# Altium PCB crossBarAdDaPCB1.PcbDoc (part 1 of 2)
Units mm, origin at the board's own origin, x right, y up, seen from the top; angles counter-clockwise.
Board outline 152.4 x 111.9 mm, 6 copper layers (Top Layer, Mid-Layer 1, Internal Plane 1, Internal Plane 2, Mid-Layer 2, Bottom Layer); 114 components, 142 nets, 664 pads, 264 vias.
Unrouted connection lines stored in the file: 16.
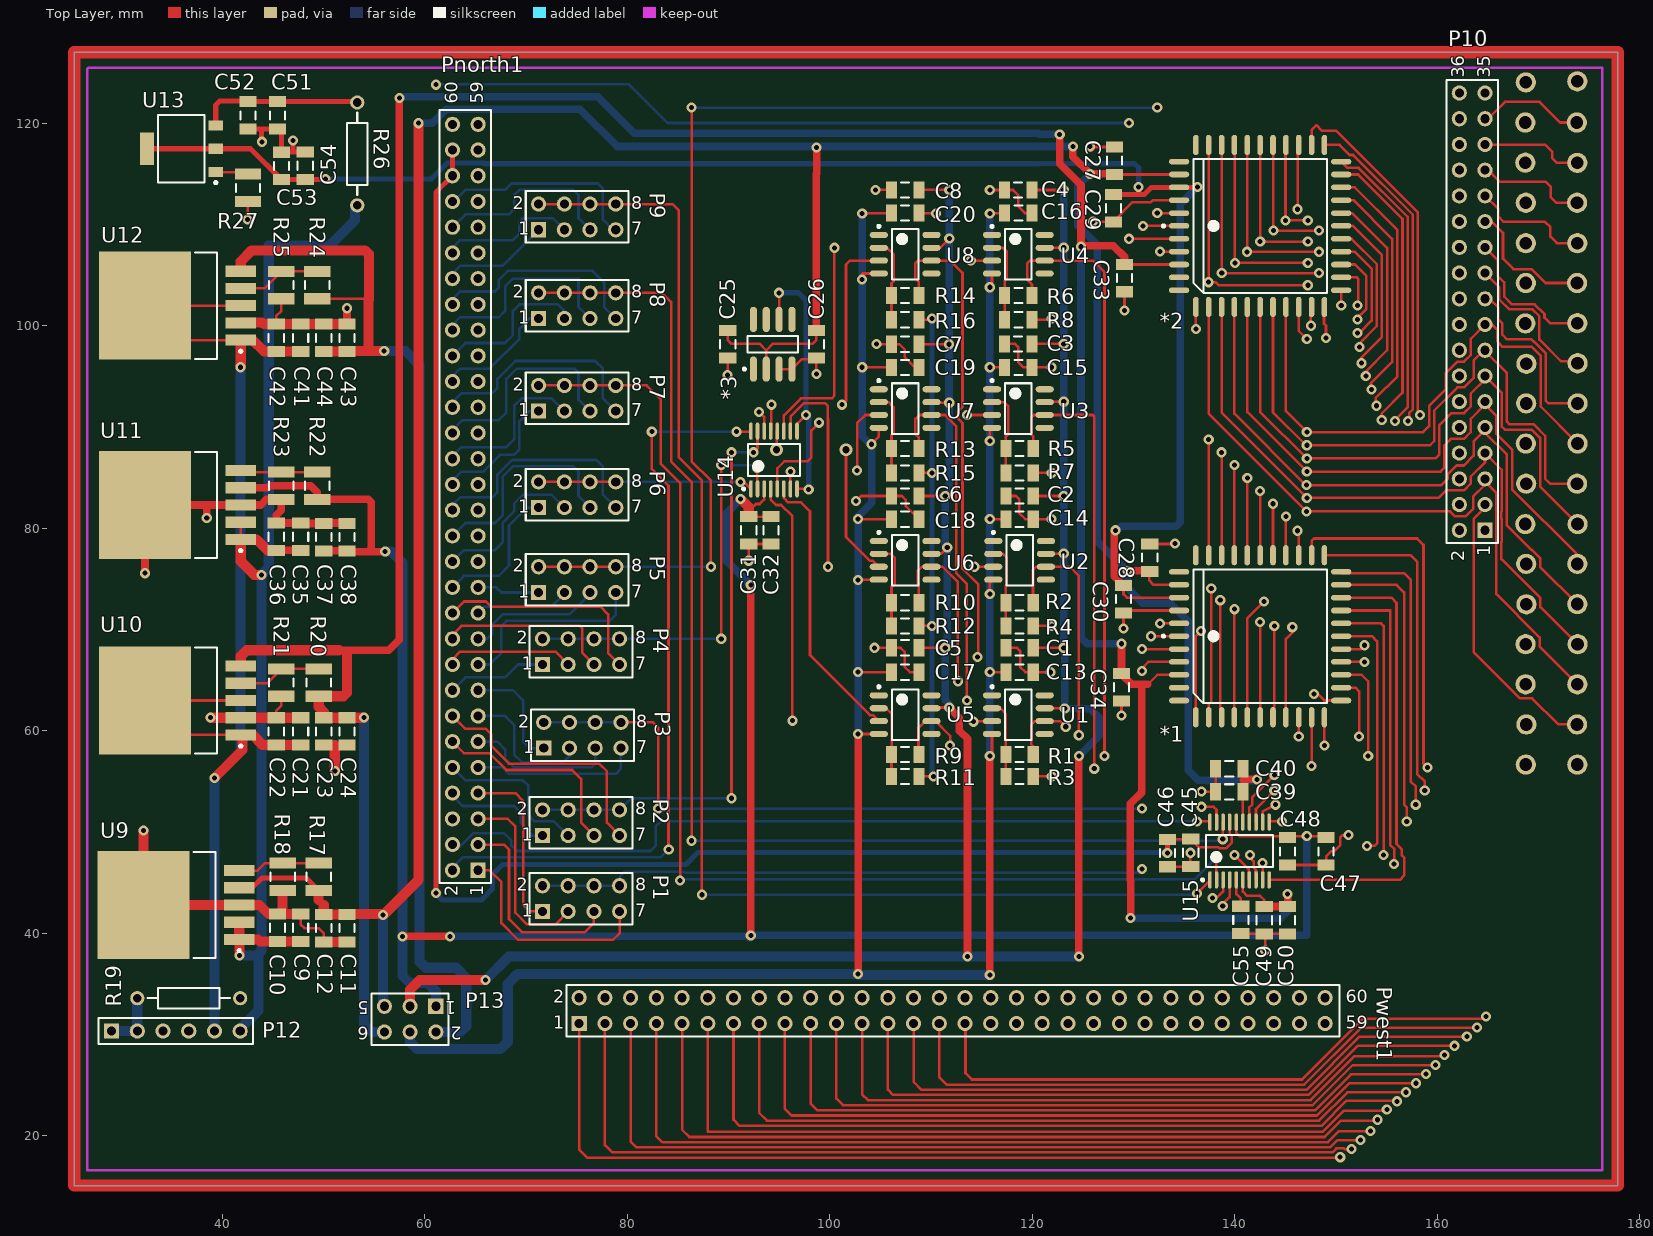
[diagram p0: Top Layer view]
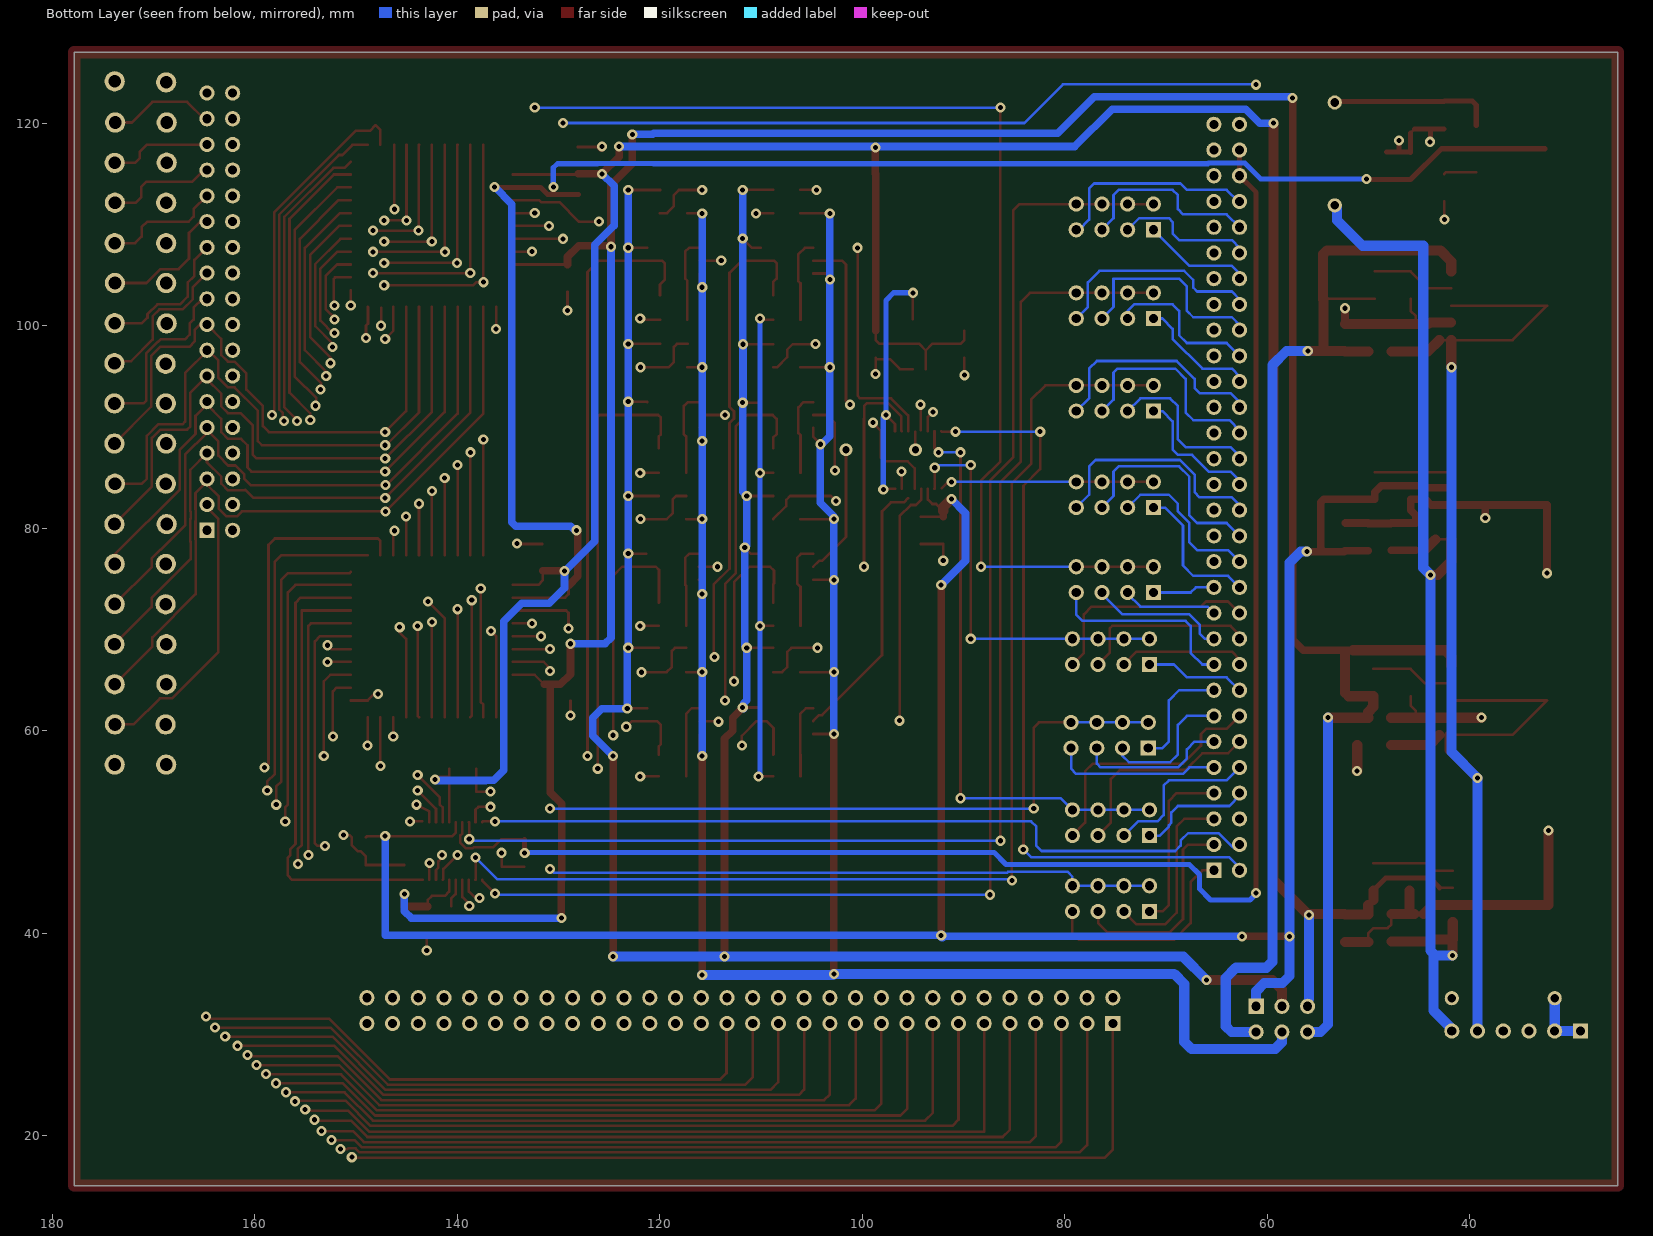
[diagram p1: Bottom Layer view, seen from below]
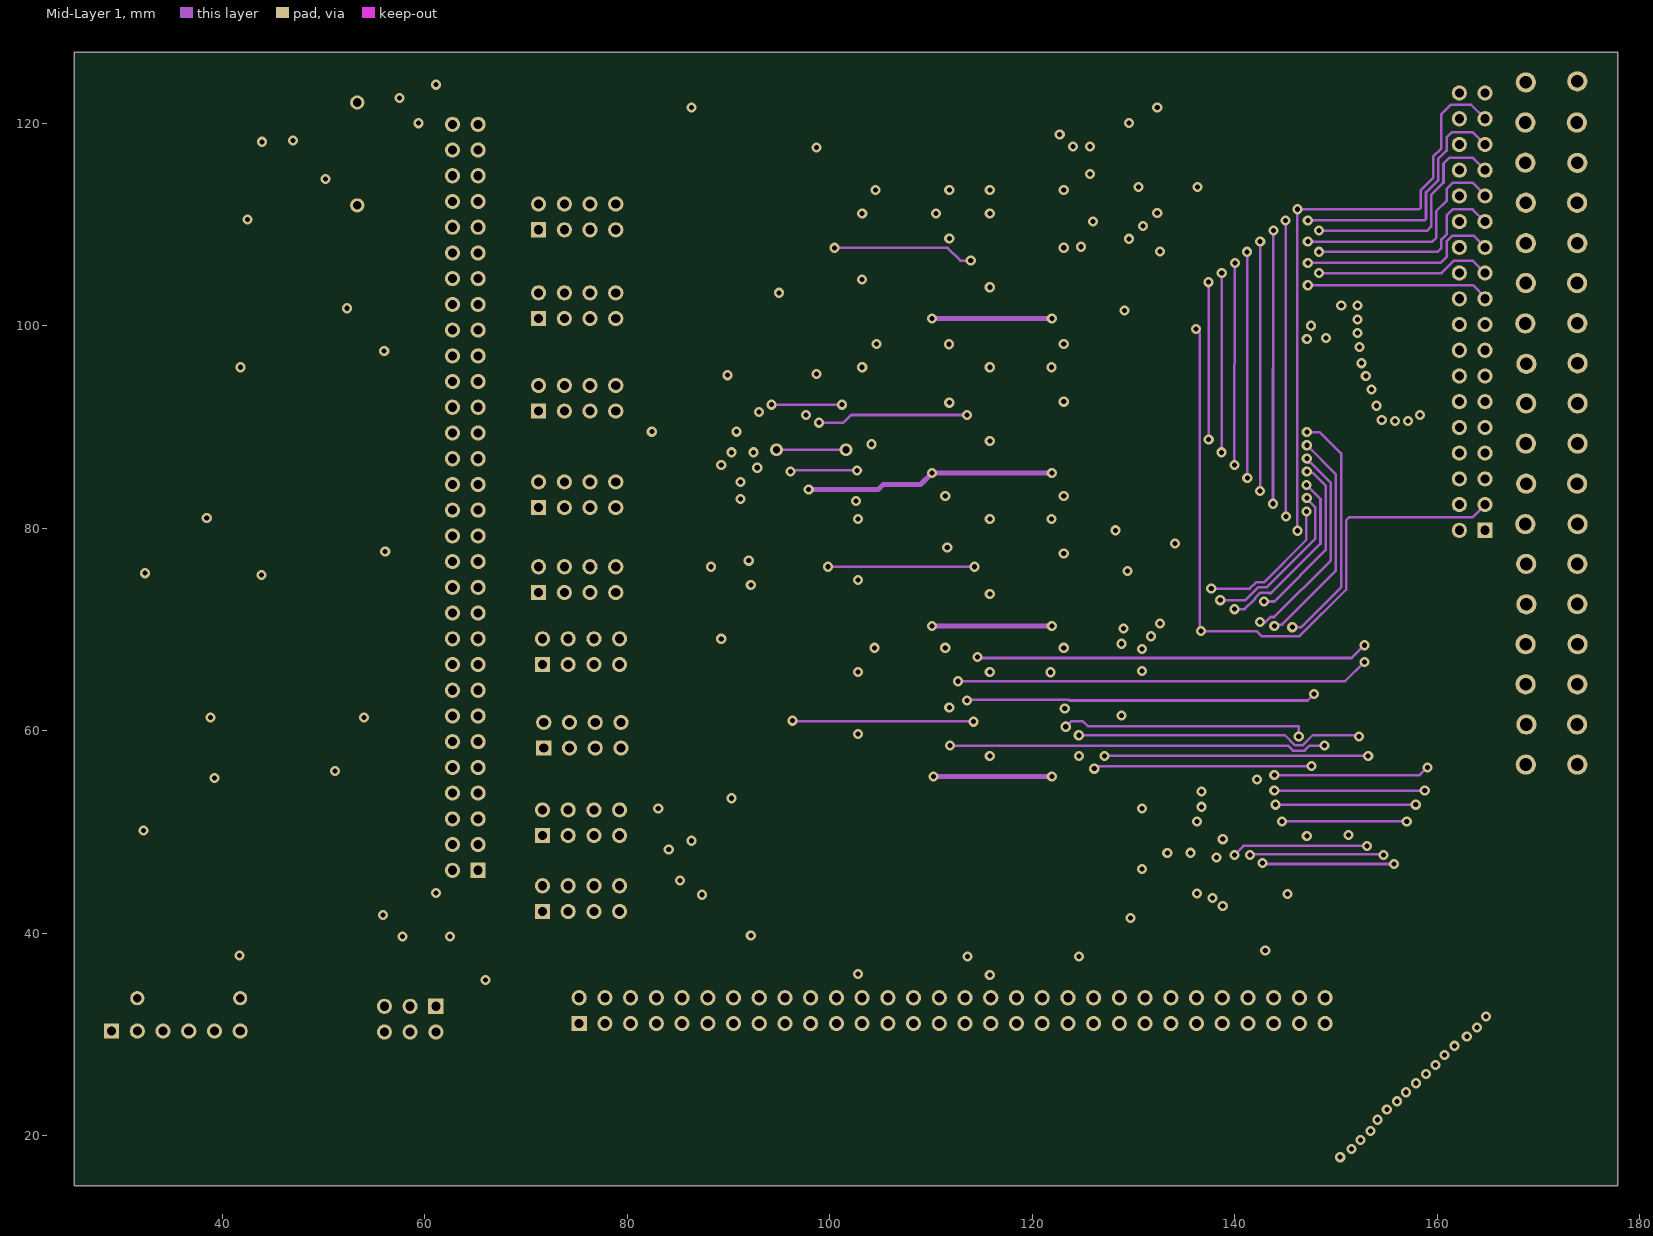
[diagram p2: Mid-Layer 1]
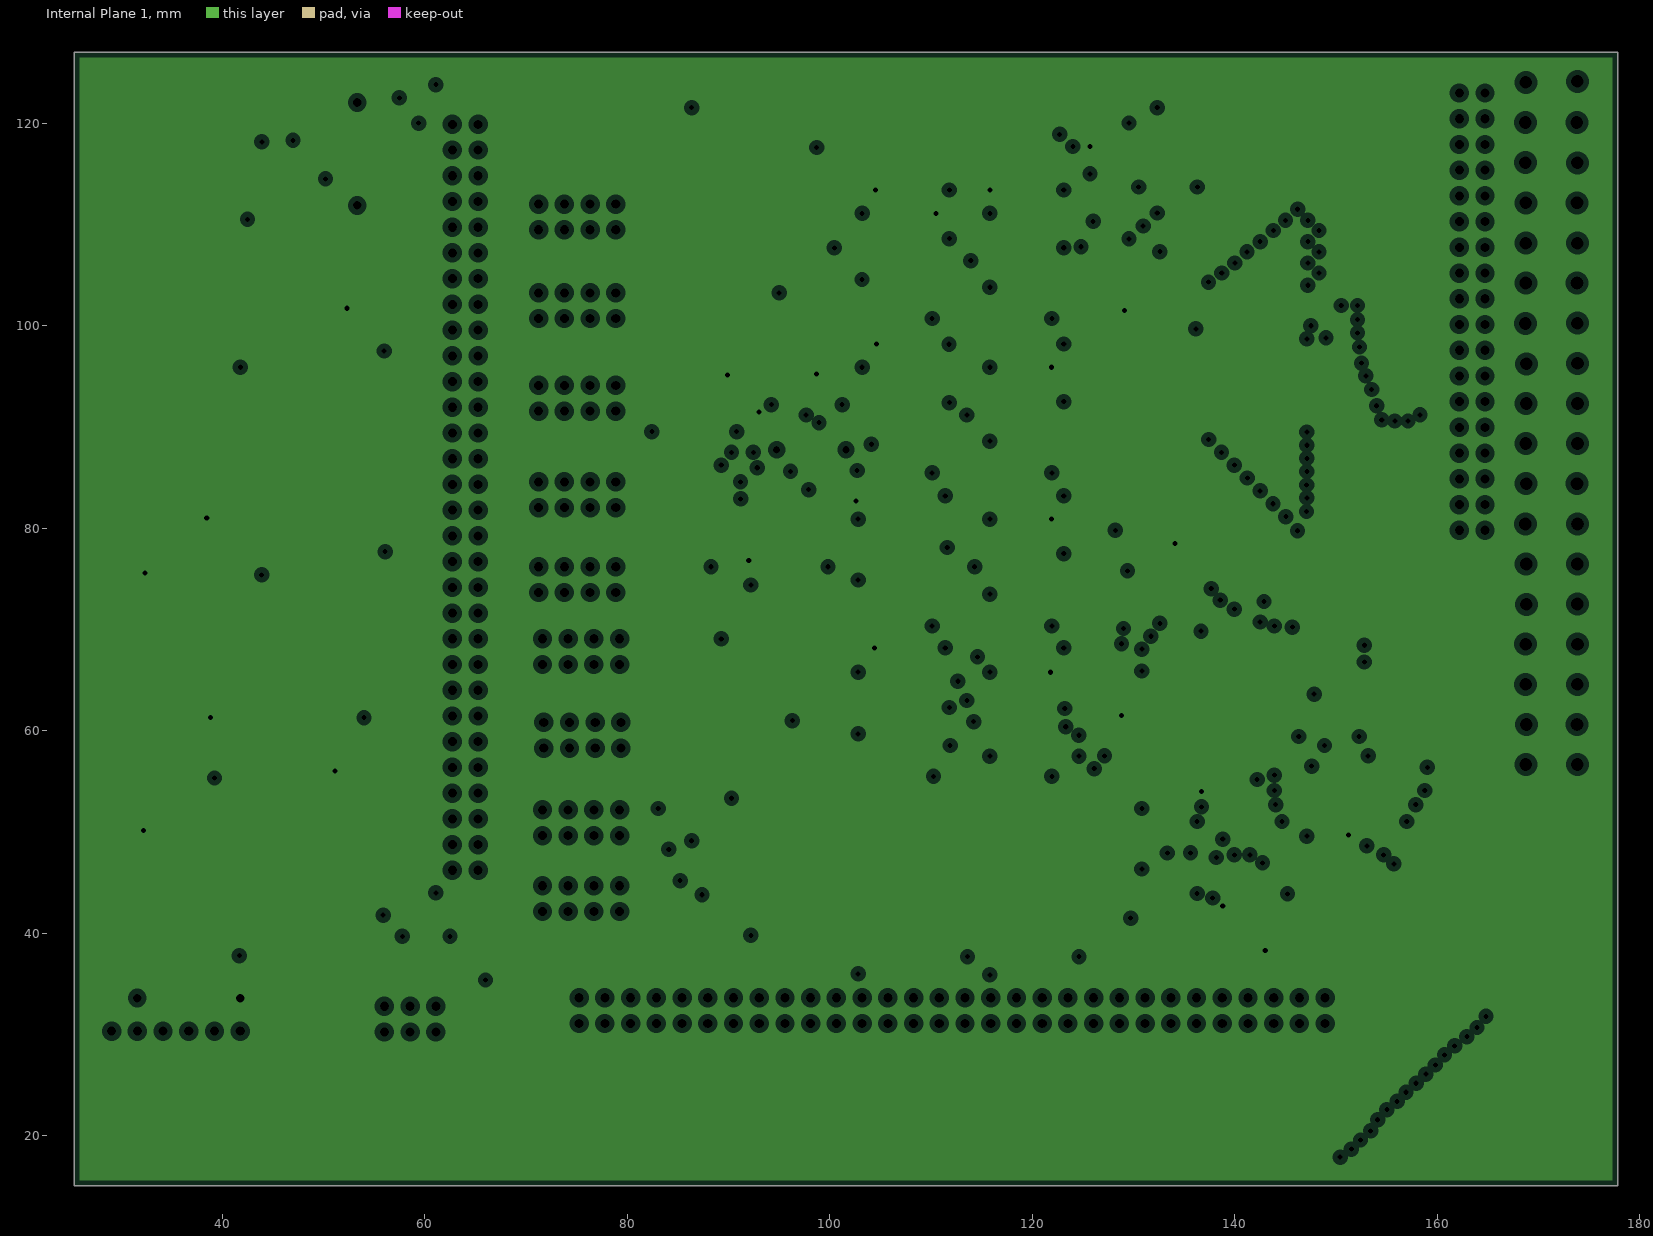
[diagram p3: Internal Plane 1, clearances drawn from the general rule]
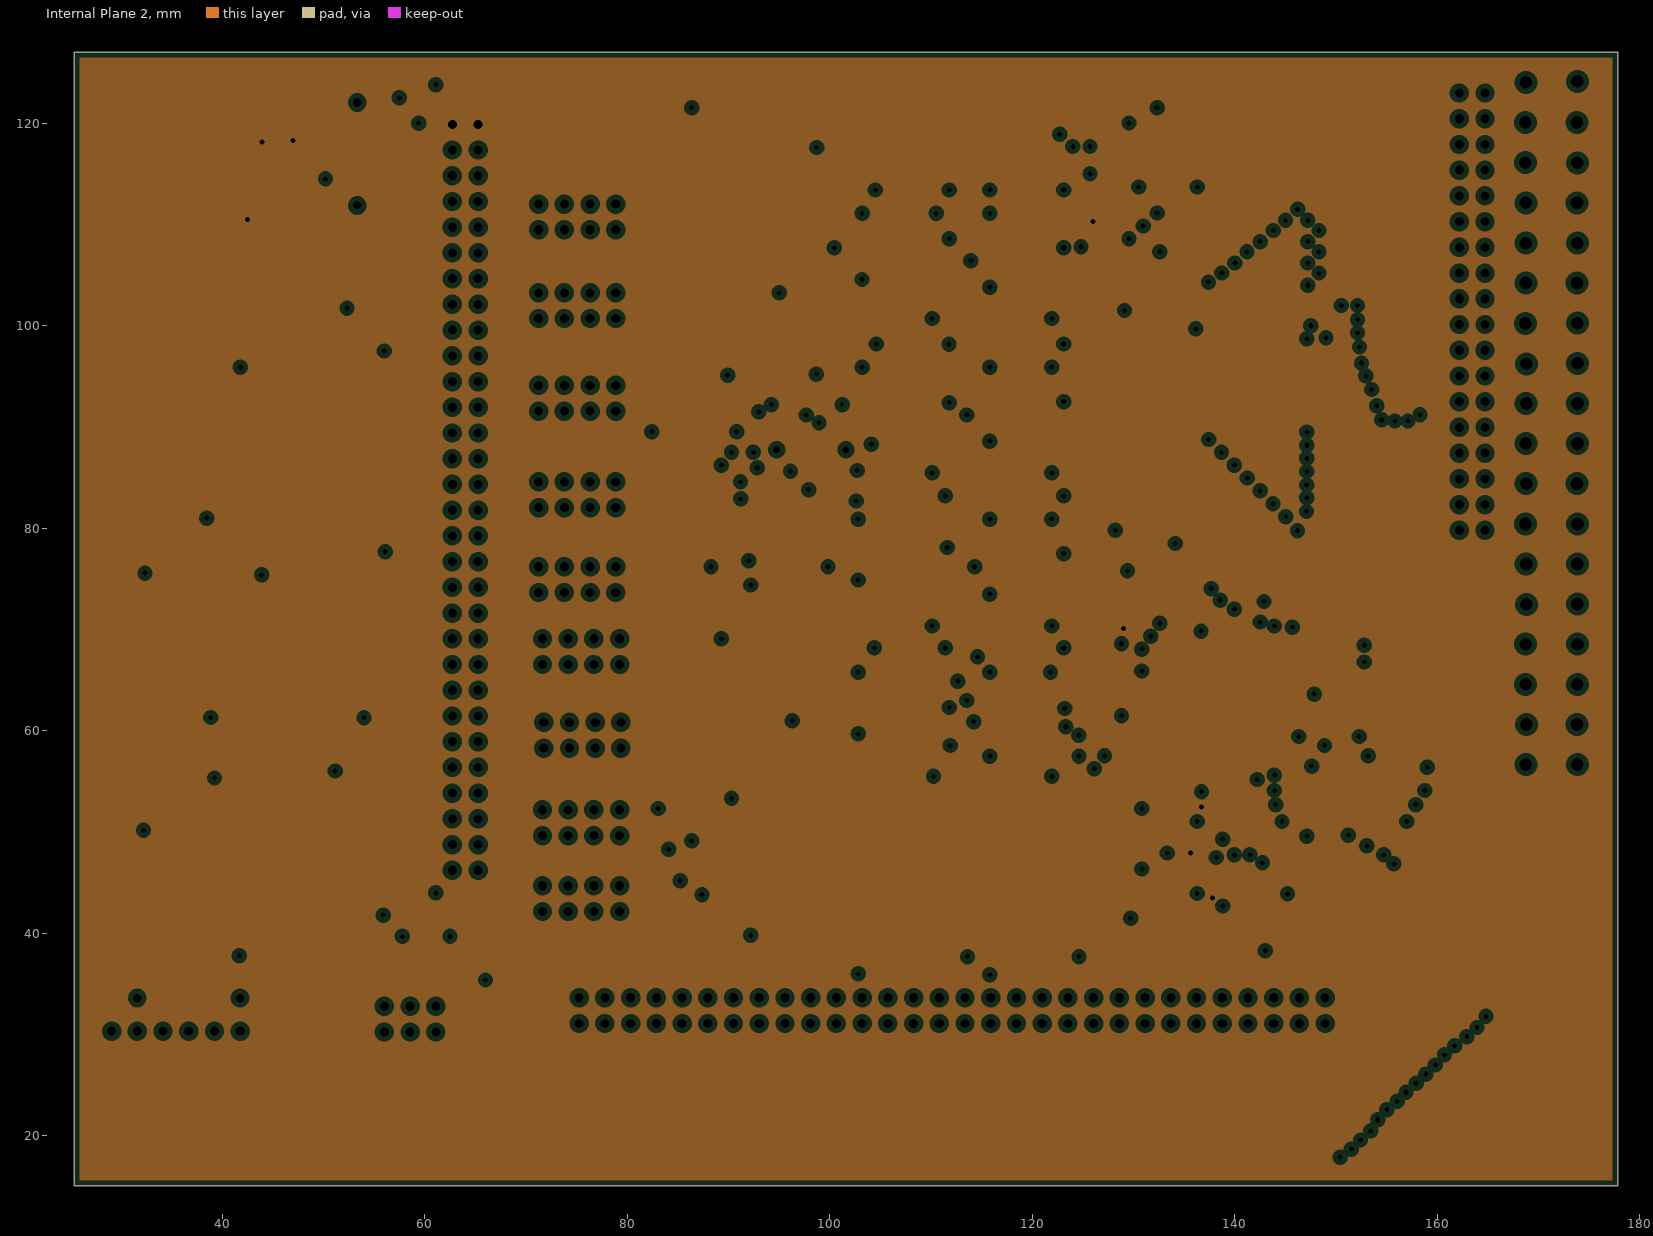
[diagram p4: Internal Plane 2, clearances drawn from the general rule]
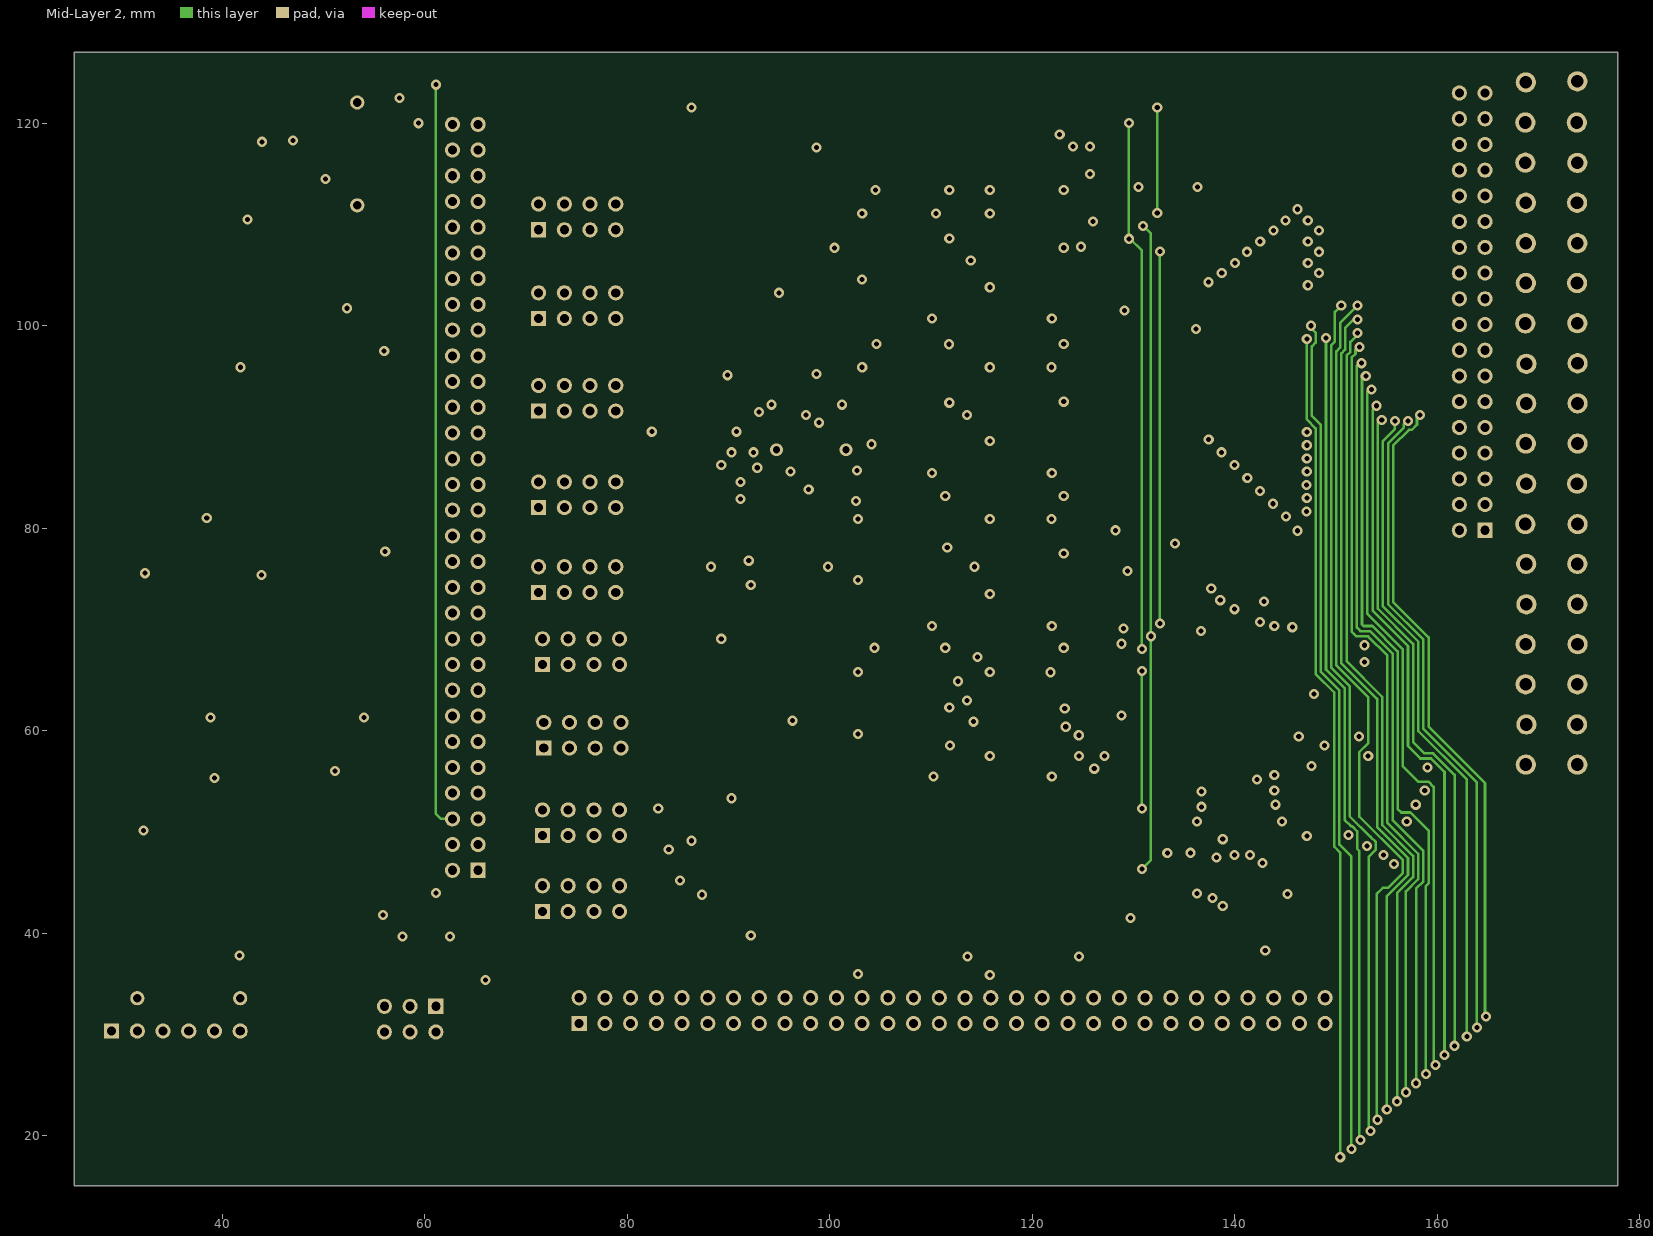
[diagram p5: Mid-Layer 2]

## Layer stack, top to bottom
Top Solder: solder mask 0.0102, Solder Resist, Dk 3.5
Top Layer: signal copper 0.0356
Dielectric1: core 0.32, FR-4, Dk 4.8
Mid-Layer 1: signal copper 0.0356
Dielectric2: prepreg 0.32, FR-4, Dk 4.8
Internal Plane 1: plane copper 0.0356, net AGND
Dielectric4: core 0.32, FR-4, Dk 4.8
Internal Plane 2: plane copper 0.0356, net GND
Dielectric5: prepreg 0.32, FR-4, Dk 4.8
Mid-Layer 2: signal copper 0.0356
Dielectric3: core 0.32, FR-4, Dk 4.8
Bottom Layer: signal copper 0.0356
Bottom Solder: solder mask 0.0102, Solder Resist, Dk 3.5

## Board outline
25.4,15.1 177.8,15.1 177.8,127 25.4,127

## Design rules (kind name [scope] priority, off if disabled: settings)
Clearance [All] p1: gap=0.203
MinimumSolderMaskSliver [All] p1: minsoldermaskwidth=0.05
PlaneClearance [All] p1: clearance=0.508
PlaneConnect [All] p1: planeconnectstyle=Relief reliefexpansion=0.508 reliefentries=4 reliefconductorwidth=0.254 reliefairgap=0.254
PolygonConnect [All] p1: connectstyle=Relief reliefconductorwidth=0.254 reliefentries=4 polygonreliefangle="90 Angle" airgapwidth=0.254
RoomDefinition Designator_2 [InComponentClass('Designator')] p1: confinementstyle=ConfineIn formatcopy=TRUE lockcomponents=FALSE outline 178.943,26.797 187.833,26.797 187.833,35.941 178.943,35.941
RoomDefinition Designator_1 [InComponentClass('Designator')] p2: confinementstyle=ConfineIn formatcopy=TRUE lockcomponents=FALSE outline 178.943,26.797 187.833,26.797 187.833,35.941 178.943,35.941
RoomDefinition Sheet1 [InComponentClass('Sheet1')] p3 off: confinementstyle=ConfineIn formatcopy=TRUE lockcomponents=FALSE outline 13.97,138.557 430.911,138.557 430.911,169.037 13.97,169.037
RoutingVias [All] p1: holewidth=0.5 width=1 viastyle="Through Hole" minholewidth=0.5 minwidth=1 maxholewidth=0.5 maxwidth=1
SilkToSilkClearance [All] p1 off: silktosilkclearance=0.254
SilkToSolderMaskClearance SilkscreenOverComponentPads [IsPad] p1 off: minsilkscreentomaskgap=0.254 clearancetoexposedcopper=TRUE
SolderMaskExpansion [All] p1: expansion=0.102
Width [All] p1: maxlimit=1.5 minlimit=0.254 preferedwidth=0.254 minimp=50.000000 maximp=50.000000 favimp=50.000000
24 further rules are at their usual default settings.

## Classes and differential pairs
component class Designator: *3 C1 C2 C3 C4 C5 C6 C7 C8 C9 C10 C11 C12 C13 C14 C15 C16 C17 C18 C19 C20 C21 C22 C23 C24 C25 C26 C27 C28 C29 C30 C31 C32 C33 C34 C35 C36 C37 C38 C39 C40 C41 C42 C43 C44 C45 C46 C47 C48 C49 C50 C51 C52 C53 C54 P12 P13 R17 R18 R19 R20 R21 R22 R23 R24 R25 R26 R27 U9 U10 U11 U12 U13
component class Sheet1: C55 U14 U15

## Components (designator, comment, footprint, x,y, rotation, side; value= is the part's Value field where it differs from the comment)
*1 "AD75019" PLCC-44AL 142.494,69.342 r90 top
*2 "AD75019" PLCC-44AL 142.494,109.855 r90 top
*3 "REF19x Serie" SOIC127P600-8M 94.361,98.171 r90 top
C1 "Cap Semi" C1206 118.745,68.199 r180 top
C2 "Cap Semi" C1206 118.745,83.185 r180 top
C3 "Cap Semi" C1206 118.6,98.2 r0 top
C4 "Cap Semi" C1206 118.6,113.4 r0 top
C5 "Cap Semi" C1206 107.442,68.199 r0 top
C6 "Cap Semi" C1206 107.442,83.185 r0 top
C7 "Cap Semi" C1206 107.442,98.171 r0 top
C8 "Cap Semi" C1206 107.442,113.411 r0 top
C9 "Cap Semi" C1206 47.752,40.56 r270 top
C10 "Cap Semi" C1206 45.466,40.56 r270 top
C11 "Cap Semi" C1206 52.324,40.513 r90 top
C12 "Cap Semi" C1206 50.038,40.513 r90 top
C13 "Cap Semi" C1206 118.745,65.786 r0 top
C14 "Cap Semi" C1206 118.745,80.899 r0 top
C15 "Cap Semi" C1206 118.618,95.885 r0 top
C16 "Cap Semi" C1206 118.618,111.125 r0 top
C17 "Cap Semi" C1206 107.442,65.786 r0 top
C18 "Cap Semi" C1206 107.442,80.899 r0 top
C19 "Cap Semi" C1206 107.442,95.885 r0 top
C20 "Cap Semi" C1206 107.442,111.125 r0 top
C21 "Cap Semi" C1206 47.752,59.944 r270 top
C22 "Cap Semi" C1206 45.339,59.944 r270 top
C23 "Cap Semi" C1206 50.038,59.944 r90 top
C24 "Cap Semi" C1206 52.324,59.944 r90 top
C25 "Cap Semi" C1206 89.916,98.171 r90 top
C26 "Cap Semi" C1206 98.679,98.171 r90 top
C27 "Cap Semi" C1206 128.1,116.3 r270 top
C28 "Cap Semi" C1206 131.6,77.1 r270 top
C29 "Cap Semi" C1206 128,111.6 r90 top
C30 "Cap Semi" C1206 129,73 r90 top
C31 "Cap Semi" C1206 92,79.8 r90 top
C32 "Cap Semi" C1206 94.2,79.8 r90 top
C33 "Cap Semi" C1206 129.1,104.7 r270 top
C34 "Cap Semi" C1206 128.8,64.3 r270 top
C35 "Cap Semi" C1206 47.752,79.168 r270 top
C36 "Cap Semi" C1206 45.339,79.168 r270 top
C37 "Cap Semi" C1206 50.038,79.121 r270 top
C38 "Cap Semi" C1206 52.324,79.121 r270 top
C39 "Cap Semi" C1206 139.446,53.975 r0 top
C40 "Cap Semi" C1206 139.446,56.261 r0 top
C41 "Cap Semi" C1206 47.752,98.806 r270 top
C42 "Cap Semi" C1206 45.339,98.806 r270 top
C43 "Cap Semi" C1206 52.324,98.806 r270 top
C44 "Cap Semi" C1206 50.038,98.806 r270 top
C45 "Cap Semi" C1206 135.636,47.959 r90 top
C46 "Cap Semi" C1206 133.35,47.926 r90 top
C47 "Cap Semi" C1206 149,48.1 r270 top
C48 "Cap Semi" C1206 145.2,48.1 r270 top
C49 "Cap Semi" C1206 142.9,41.3 r270 top
C50 "Cap Semi" C1206 145.2,41.3 r270 top
C51 "Cap Semi" C1206 45.466,120.777 r270 top
C52 "Cap Semi" C1206 42.545,120.777 r270 top
C53 "Cap Semi" C1206 45.847,115.777 r90 top
C54 "Cap Semi" C1206 48.2,115.8 r90 top
C55 "Cap Semi" C1206 140.589,41.322 r270 top
P1 "Header 4X2" HDR2X4 71.628,42.164 r0 top
P2 "Header 4X2" HDR2X4 71.628,49.657 r0 top
P3 "Header 4X2" HDR2X4 71.755,58.293 r0 top
P4 "Header 4X2" HDR2X4 71.628,66.548 r0 top
P5 "Header 4X2" HDR2X4 71.247,73.66 r0 top
P6 "Header 4X2" HDR2X4 71.247,82.042 r0 top
P7 "Header 4X2" HDR2X4 71.247,91.567 r0 top
P8 "Header 4X2" HDR2X4 71.247,100.711 r0 top
P9 "Header 4X2" HDR2X4 71.247,109.474 r0 top
P10 "Header 18X2" HDR2X18 164.7,79.8 r90 top
P12 "Header 6" HDR1X6 29.083,30.353 r0 top
P13 "Header 3X2" HDR2X3 61.1,32.8 r180 top
Pnorth1 "Header 30X2" HDR2X30 65.278,46.228 r90 top locked
Pwest1 "Header 30X2" HDR2X30 75.253,31.103 r0 top locked
R1 "Res1" C1206 118.745,57.658 r0 top
R2 "Res1" C1206 118.745,72.644 r0 top
R3 "Res1" C1206 118.745,55.499 r180 top
R4 "Res1" C1206 118.745,70.358 r180 top
R5 "Res1" C1206 118.745,87.884 r0 top
R6 "Res1" C1206 118.618,102.997 r0 top
R7 "Res1" C1206 118.745,85.471 r180 top
R8 "Res1" C1206 118.618,100.584 r180 top
R9 "Res1" C1206 107.442,57.658 r0 top
R10 "Res1" C1206 107.442,72.644 r0 top
R11 "Res1" C1206 107.442,55.499 r180 top
R12 "Res1" C1206 107.442,70.358 r180 top
R13 "Res1" C1206 107.442,87.884 r0 top
R14 "Res1" C1206 107.442,102.997 r0 top
R15 "Res1" C1206 107.442,85.471 r180 top
R16 "Res1" C1206 107.442,100.584 r180 top
R17 "Res3" 14-1210 49.53,45.593 r270 top
R18 "Res3" 14-1210 45.974,45.593 r90 top
R19 "Ferrit" AXIAL-0.4 36.7,33.6 r180 top
R20 "Res3" 14-1210 49.53,64.77 r270 top
R21 "Res3" 14-1210 45.847,64.77 r90 top
R22 "Res3" 14-1210 49.403,84.201 r270 top
R23 "Res3" 14-1210 45.847,84.201 r90 top
R24 "Res3" 14-1210 49.403,104.013 r270 top
R25 "Res3" 14-1210 45.847,104.013 r90 top
R26 "Ferrit" AXIAL-0.4 53.34,116.967 r270 top
R27 "Res3" 14-1210 42.545,113.618 r90 top
U1 "AD820BR" R-8D_N 118.618,61.595 r0 top
U2 "AD820BR" R-8D_N 118.745,76.835 r0 top
U3 "AD820BR" R-8D_N 118.618,91.821 r0 top
U4 "AD820BR" R-8D_N 118.618,107.061 r0 top
U5 "AD820BR" R-8D_N 107.442,61.595 r0 top
U6 "AD820BR" R-8D_N 107.442,76.835 r0 top
U7 "AD820BR" R-8D_N 107.442,91.821 r0 top
U8 "AD820BR" R-8D_N 107.442,107.061 r0 top
U9 "LT1963AEQ" LT-Q-5_N 35.433,42.799 r180 top
U10 "LT3015EQ#TRPBF" LT-Q-5_N 35.585,62.992 r180 top
U11 "LT1963AEQ" LT-Q-5_N 35.585,82.296 r180 top
U12 "LT3015EQ#TRPBF" LT-Q-5_N 35.585,101.981 r180 top
U13 "LT3080EST" LT-ST-3-SOT-223_N 35.97,117.475 r180 top
U14 "AD5308BRUZ" RU-16_N 94.488,86.741 r90 top
U15 "AD7327BRUZ" RU-20_N 140.462,48.133 r90 top

## Footprints (in the part's own frame and the unit in brackets; to place one, negate y for a bottom-side part, rotate by r counter-clockwise, add the part's x,y. Pads: shape width x height; smd on the part's side, far side on the other; paste and mask are expansions set on the pad)
14-1210 [mm] "Chip Resistor, Body 3.2x2.5mm, IPC High Density"
  rect 1.1x2.6 smd: 1(-1.35,0) 2(1.35,0)
  silkscreen extent -0.4,-1.2 0.4,1.2, body extent -1.68,-1.32 1.68,1.32, height 0.9
AXIAL-0.4 [mm] "Axial Device, Thru-Hole; 2 Leads; 0.4 in Pin Spacing"
  round 1.4 hole 0.85: 1(-5.08,0) 2(5.08,0)
  silkscreen extent -4.06,-1.02 4.06,1.02
C1206 [mm] "Chip Capacitor, Body 3.2x1.6mm, IPC High Density"
  rect 1.1x1.7 smd: 1(-1.35,0) 2(1.35,0)
  silkscreen extent -0.4,-0.75 0.4,0.75, body extent -1.7,-0.9 1.7,0.9, height 1.3
HDR1X6 [mm] "Connector; Header; 6 Position"
  rect 1.5x1.5 hole 0.9: 1(0,0)
  round 1.5 hole 0.9: 2(2.54,0) 3(5.08,0) 4(7.62,0) 5(10.16,0) 6(12.7,0)
  silkscreen extent -1.27,-1.27 13.97,1.27
HDR2X3 [mm] "Connector; Header; 3x2 Position"
  rect 1.5x1.5 hole 0.9: 1(0,0)
  round 1.5 hole 0.9: 2(0,2.54) 3(2.54,0) 4(2.54,2.54) 5(5.08,0) 6(5.08,2.54)
  silkscreen extent -1.27,-1.27 6.35,3.81
HDR2X4 [mm] "Connector; Header; 4x2 Position"
  rect 1.5x1.5 hole 0.9: 1(0,0)
  round 1.5 hole 0.9: 2(0,2.54) 3(2.54,0) 4(2.54,2.54) 5(5.08,0) 6(5.08,2.54) 7(7.62,0) 8(7.62,2.54)
  silkscreen extent -1.27,-1.27 8.89,3.81
HDR2X18 [mm] "Connector; Header; 18x2 Position"
  rect 1.5x1.5 hole 0.9: 1(0,0)
  round 1.5 hole 0.9: 2(0,2.54) 3(2.54,0) 4(2.54,2.54) 5(5.08,0) 6(5.08,2.54) 7(7.62,0) 8(7.62,2.54) 9(10.16,0) 10(10.16,2.54) 11(12.7,0) 12(12.7,2.54) 13(15.24,0) 14(15.24,2.54) 15(17.78,0) 16(17.78,2.54) 17(20.32,0) 18(20.32,2.54) 19(22.86,0) 20(22.86,2.54) 21(25.4,0) 22(25.4,2.54) 23(27.94,0) 24(27.94,2.54) 25(30.48,0) 26(30.48,2.54) 27(33.02,0) 28(33.02,2.54) 29(35.56,0) 30(35.56,2.54) 31(38.1,0) 32(38.1,2.54) 33(40.64,0) 34(40.64,2.54) 35(43.18,0) 36(43.18,2.54)
  silkscreen extent -1.27,-1.27 44.45,3.81
HDR2X30 [mm] "Connector; Header; 30x2 Position"
  rect 1.5x1.5 hole 0.9: 1(0,0)
  round 1.5 hole 0.9: 2(0,2.54) 3(2.54,0) 4(2.54,2.54) 5(5.08,0) 6(5.08,2.54) 7(7.62,0) 8(7.62,2.54) 9(10.16,0) 10(10.16,2.54) 11(12.7,0) 12(12.7,2.54) 13(15.24,0) 14(15.24,2.54) 15(17.78,0) 16(17.78,2.54) 17(20.32,0) 18(20.32,2.54) 19(22.86,0) 20(22.86,2.54) 21(25.4,0) 22(25.4,2.54) 23(27.94,0) 24(27.94,2.54) 25(30.48,0) 26(30.48,2.54) 27(33.02,0) 28(33.02,2.54) 29(35.56,0) 30(35.56,2.54) 31(38.1,0) 32(38.1,2.54) 33(40.64,0) 34(40.64,2.54) 35(43.18,0) 36(43.18,2.54) 37(45.72,0) 38(45.72,2.54) 39(48.26,0) 40(48.26,2.54) 41(50.8,0) 42(50.8,2.54) 43(53.34,0) 44(53.34,2.54) 45(55.88,0) 46(55.88,2.54) 47(58.42,0) 48(58.42,2.54) 49(60.96,0) 50(60.96,2.54) 51(63.5,0) 52(63.5,2.54) 53(66.04,0) 54(66.04,2.54) 55(68.58,0) 56(68.58,2.54) 57(71.12,0) 58(71.12,2.54) 59(73.66,0) 60(73.66,2.54)
  silkscreen extent -1.27,-1.27 75.06,3.81
LT-Q-5_N [mm] "DPAK, 5-Leads, Body 10.22x8.89mm, Pitch 1.702mm, IPC Medium Density"
  rect 3x1.1 smd: 1(-6.25,3.4) 2(-6.25,1.7) 3(-6.25,0) 4(-6.25,-1.7) 5(-6.25,-3.4)
  rect 9.1x10.65 smd: 6(3.2,0)
  silkscreen extent -6.38,-5.25 -1.75,5.25, body extent -3.9,-5.27 5.5,5.28, height 4.78
LT-ST-3-SOT-223_N [mm] "SOT223, 4-Leads, Body 6.505x3.505mm, Pitch 2.3mm, IPC Medium Density"
  rect 1.4x1 smd: 1(-3.4,2.3) 2(-3.4,0) 3(-3.4,-2.3)
  rect 1.4x3.25 smd: 4(3.4,0)
  silkscreen extent -3.53,-3.35 2.3,3.47, body extent -1.86,-3.35 1.86,3.35, height 1.8
PLCC-44AL [mm] "Leaded Chip Carrier, 44-Leads, Body 16.6x16.6mm, Pitch 1.27mm, IPC High Density"
  oval 0.55x2 smd: 1(0,8) 2(-1.27,8) 3(-2.54,8) 4(-3.81,8) 5(-5.08,8) 6(-6.35,8) 18(-6.35,-8) 19(-5.08,-8) 20(-3.81,-8) 21(-2.54,-8) 22(-1.27,-8) 23(0,-8) 24(1.27,-8) 25(2.54,-8) 26(3.81,-8) 27(5.08,-8) 28(6.35,-8) 40(6.35,8) 41(5.08,8) 42(3.81,8) 43(2.54,8) 44(1.27,8)
  oval 2x0.55 smd: 7(-8,6.35) 8(-8,5.08) 9(-8,3.81) 10(-8,2.54) 11(-8,1.27) 12(-8,0) 13(-8,-1.27) 14(-8,-2.54) 15(-8,-3.81) 16(-8,-5.08) 17(-8,-6.35) 29(8,-6.35) 30(8,-5.08) 31(8,-3.81) 32(8,-2.54) 33(8,-1.27) 34(8,0) 35(8,1.27) 36(8,2.54) 37(8,3.81) 38(8,5.08) 39(8,6.35)
  silkscreen extent -6.6,-6.6 6.6,9.67, body extent -8.33,-8.33 8.33,8.33, height 4.57
R-8D_N [mm] "SOIC, 8-Leads, Body 4.9x3.9mm, Pitch 1.27mm, IPC Medium Density"
  oval 1.8x0.6 smd: 1(-2.6,1.905) 2(-2.6,0.635) 3(-2.6,-0.635) 4(-2.6,-1.905) 5(2.6,-1.905) 6(2.6,-0.635) 7(2.6,0.635) 8(2.6,1.905)
  silkscreen extent -2.72,-2.5 1.3,2.88, body extent -2,-2.5 2,2.5, height 2.59
RU-16_N [mm] "TSOP, 16-Leads, Body 5x4.4mm, Pitch 0.65mm, IPC Medium Density"
  oval 1.7x0.35 smd: 1(-2.85,2.275) 2(-2.85,1.625) 3(-2.85,0.975) 4(-2.85,0.325) 5(-2.85,-0.325) 6(-2.85,-0.975) 7(-2.85,-1.625) 8(-2.85,-2.275) 9(2.85,-2.275) 10(2.85,-1.625) 11(2.85,-0.975) 12(2.85,-0.325) 13(2.85,0.325) 14(2.85,0.975) 15(2.85,1.625) 16(2.85,2.275)
  silkscreen extent -2.97,-2.55 1.6,3.12, body extent -2.25,-2.55 2.25,2.55, height 1.2
RU-20_N [mm] "TSOP, 20-Leads, Body 6.5x4.4mm, Pitch 0.65mm, IPC Medium Density"
  oval 1.7x0.35 smd: 1(-2.85,2.925) 2(-2.85,2.275) 3(-2.85,1.625) 4(-2.85,0.975) 5(-2.85,0.325) 6(-2.85,-0.325) 7(-2.85,-0.975) 8(-2.85,-1.625) 9(-2.85,-2.275) 10(-2.85,-2.925) 11(2.85,-2.925) 12(2.85,-2.275) 13(2.85,-1.625) 14(2.85,-0.975) 15(2.85,-0.325) 16(2.85,0.325) 17(2.85,0.975) 18(2.85,1.625) 19(2.85,2.275) 20(2.85,2.925)
  silkscreen extent -2.97,-3.3 1.6,3.77, body extent -2.25,-3.3 2.25,3.3, height 1.2
SOIC127P600-8M [mm] "SOIC, 8-Leads, Body 4.9x3.9mm, Pitch 1.27mm, IPC Low Density"
  oval 2.5x0.7 smd: 1(-2.45,1.905) 2(-2.45,0.635) 3(-2.45,-0.635) 4(-2.45,-1.905) 5(2.45,-1.905) 6(2.45,-0.635) 7(2.45,0.635) 8(2.45,1.905)
  silkscreen extent -2.57,-2.5 0.8,2.93, body extent -2,-2.5 2,2.5, height 1.75

## Part data
*1 *2: library part Component_1, "crosspoint 16x16"
C1 C2 C3 C4 C5 C6 C7 C8 C9 C10 C11 C12 C13 C14 C15 C16 C17 C18 C19 C20 C21 C22 C23 C24 C25 C26 C27 C28 C29 C30 C31 C32 C33 C34 C35 C36 C37 C38 C39 C40 C41 C42 C43 C44 C45 C46 C47 C48 C49 C50 C51 C52 C53 C54 C55: "Capacitor (Semiconductor SIM Model)"
P1 P2 P3 P4 P5 P6 P7 P8 P9: "Header, 4-Pin, Dual row"
P10: "Header, 18-Pin, Dual row"
P12: "Header, 6-Pin"
P13: "Header, 3-Pin, Dual row"
Pnorth1 Pwest1: "Header, 30-Pin, Dual row"
R1 R2 R3 R4 R5 R6 R7 R8 R9 R10 R11 R12 R13 R14 R15 R16 R17 R18 R20 R21 R22 R23 R24 R25 R27: "Resistor"
R19 R26: library part Res2, "Resistor"
U1 U2 U3 U4 U5 U6 U7 U8: "Single-Supply, Rail-to-Rail Low-Power FET-Input Operational Amplifier"
U9 U11: "1.5 A, Low Noise, Fast Transient Response LDO Regulator, 2.1 to 20 V Vin, Adjustable Vout, 5-pin DPAK (Q-5), -40 to 125 degC"
U10 U12: "1.5 A, Low Noise, Negative Linear Regulator with Precision Current Limit, -1.8 to -30 V Vin, Adjustable Vout, 5-pin DPAK (Q-5), -40 to 125 degC, Pb-Free, Tape and Reel"
U13: "Adjustable 1.1 A Single Resistor Low Dropout Regulator, 0.3 mA Isupply, 3-pin SOT223 (ST-3), -40 to 125 degC"
U14: "Octal 8-Bit Voltage Output Digital-to-Analog Converter, 2.5 to 5.5 V, -40 to +125 degC, RU-16, Pb-Free, Tube"
U15: "Octal 12-Bit True Bipolar Input Plus Sign Analog-to-Digital Converter with Serial, SPI Interface, Software-Selectable, 500KSPS, -40 to +85 degC, RU-20, Pb-Free, Tube"

## Free pads (board coordinates)
  round 2 hole 1.25: 1(168.732,124.028) 2(173.812,124.13) 3(168.681,120.066) 4(173.761,120.066) 5(168.681,116.103) 6(173.812,116.078) 7(168.732,112.141) 8(173.787,112.141) 9(168.732,108.153) 10(173.812,108.153) 11(168.732,104.216) 12(173.787,104.216) 13(168.681,100.228) 14(173.812,100.254) 15(168.783,96.241) 16(173.838,96.291) 17(168.758,92.329) 18(173.838,92.329) 19(168.732,88.367) 20(173.838,88.367) 21(168.758,84.404) 22(173.787,84.404) 23(168.681,80.416) 24(173.838,80.416) 25(168.758,76.479) 26(173.812,76.479) 27(168.783,72.492) 28(173.812,72.517) 29(168.707,68.555) 30(173.838,68.555) 31(168.707,64.592) 32(173.812,64.592) 33(168.783,60.63) 34(173.787,60.63) 35(168.732,56.667) 36(173.812,56.667)

## Via types
v1: diameter 1, hole 0.5, Top Layer to Bottom Layer, 262 vias
v2: diameter 1.27, hole 0.711, Top Layer to Bottom Layer, 2 vias

## Nets (pads, with @x,y where several pads share a name; then routed paths per layer and width w, separated by ;. In a path a pad name is that pad's centre, name@x,y a point inside that pad or via, vN(x,y) a via of type N, cw(c..) or ccw(c..) an arc to the next point about the centre after c; other vN are vias at no path point)
12V: C9.2 C10.2 C35.2 C36.2 P12.6 R26.2 U9.1 U9.2 U11.1 U11.2 | length 114.1
  Top Layer w0.254: U9.1@41.683,39.399 U9.1@41.7,39.382 ; U11.2@41.835,80.596 U11.1@41.835,78.896 43.405,78.896 ; 43.532,39.399 43.721,39.21 ; 44.483,77.818 C36.2@45.339,77.818
  Top Layer w0.75: C36.2@45.339,77.818 C35.2@47.752,77.818
  Top Layer w1: U9.2@41.683,41.099 U9.1@41.683,39.399 43.532,39.399 ; v1(41.7,37.8) U9.1@41.7,39.382 ; U11.1@41.835,78.896 41.835,76.735 43.17,75.4 v1(43.9,75.4) ; 43.405,78.896 44.483,77.818 ; 43.721,39.21 C10.2@45.466,39.21 C9.2@47.752,39.21
  Bottom Layer w0.254: P12.6@41.783,30.353 P12.6@41.783,30.583 ; 43.4,37.8 43.5,37.8 43.6,37.7 ; R26.2@53.1,111.647 R26.2@53.34,111.887
  Bottom Layer w1: v1(41.7,37.8) 43.4,37.8 43.9,38.3 v1(43.9,75.4) 44.6,76.1 44.6,107.9 50.6,107.9 53.1,110.4 R26.2@53.1,111.647 ; P12.6@41.783,30.583 43.6,32.4 43.6,37.7
-12V: C21.2 C22.2 C41.2 C42.2 P12.5 U10.1 U10.3 U10.6 U12.1 U12.3 U12.6 | length 128
  Top Layer w0.254: v1(41.8,95.9) v1@41.835,95.935 ; U10.3@41.835,62.992 U10.6@32.385,62.992 35.785,59.592 U10.1@41.835,59.592 42,59.592 U10.1@43.024,59.592 ; U12.3@41.835,101.981 U12.6@32.385,101.981 35.785,98.581 U12.1@41.835,98.581 U12.1@43.024,98.581
  Top Layer w1: v1(39.243,55.343) 42,58.1 U10.1@42,59.592 ; v1@41.835,95.935 U12.1@41.835,98.581 ; U12.1@43.024,98.581 44.149,97.456 C42.2@45.339,97.456 C41.2@47.752,97.456
  Top Layer w1.016: U10.1@43.024,59.592 44.022,58.594 C22.2@45.339,58.594 C21.2@47.752,58.594
  Bottom Layer w1: P12.5@39.243,30.353 v1(39.243,55.343) 41.8,57.9 v1(41.8,95.9)
AGND: *3.3 *3.4 C1.2 C2.2 C3.1 C4.1 C5.1 C6.1 C7.1 C8.1 C9.1 C10.1 C11.1 C12.1 C13.2 C14.2 C15.2 C16.2 C17.2 C18.2 C19.2 C20.2 C21.1 C22.1 C23.1 C24.1 C25.1 C26.1 C27.1 C28.1 C31.1 C32.1 C33.2 C34.2 C35.1 C36.1 C37.1 C38.1 C39.1 C40.1 C41.1 C42.1 C43.1 C44.1 C47.2 C48.2 C49.2 C50.2 C55.2 R18.1 R19.1 R21.1 R23.1 R25.1 U9.3 U9.6 U10.2 U11.3 U11.6 U12.2 U14.14 U15.4 | length 181.1
  Top Layer w0.254: U12.2@41.835,100.281 U12.2@41.884,100.33 ; C22.1@45.337,61.292 C22.1@45.339,61.294 45.339,61.976 45.847,62.484 R21.1@45.847,63.42 ; C42.1@45.339,100.156 45.339,100.965 45.847,101.473 R25.1@45.847,102.663 ; C9.1@47.752,41.91 47.752,40.894 48.133,40.513 49.53,40.513 50.038,40.005 C12.1@50.038,39.163 ; C35.1@47.752,80.518 C35.1@47.799,80.471 ; v1(89.916,95.116) C25.1@89.916,96.821 ; v1@92,77 92,77.6 ; 92,77.5 92,77.6 ; v1(93,91.5) 93.513,90.987 U14.14@93.513,89.591 ; C32.1@94.2,78.45 C31.1@92,78.45 92,77.6 ; *3.3@94.996,95.721 *3.4@96.266,95.721 97.245,96.7 98.558,96.7 C26.1@98.679,96.821 v1(98.679,95.221) ; v1(102.6,82.7) 103.085,83.185 C6.1@106.092,83.185 107.115,83.185 107.5,82.8 107.5,82.191 C18.2@108.792,80.899 ; v1(104.401,68.199) C5.1@106.092,68.199 107.001,68.199 107.4,67.8 107.4,66.3 107.914,65.786 C17.2@108.792,65.786 ; v1(104.5,113.4) 104.511,113.411 C8.1@106.092,113.411 ; v1(104.6,98.2) 104.629,98.171 C7.1@106.092,98.171 106.871,98.171 107.4,97.642 107.4,96.9 108.415,95.885 C19.2@108.792,95.885 ; C20.2@108.792,111.125 110.475,111.125 v1(110.5,111.1) ; v1(115.8,113.4) C4.1@117.25,113.4 118.1,113.4 118.6,112.9 118.6,111.8 119.275,111.125 C16.2@119.968,111.125 ; C3.1@117.25,98.2 118.3,98.2 118.6,97.9 118.6,96.4 119.115,95.885 C15.2@119.968,95.885 119.983,95.9 v1(121.9,95.9) ; C1.2@117.395,68.199 118.501,68.199 118.8,67.9 118.8,66.3 119.314,65.786 C13.2@120.095,65.786 v1(121.786,65.786) ; C2.2@117.395,83.185 118.385,83.185 118.7,82.87 118.7,81.5 119.301,80.899 C14.2@120.095,80.899 v1(121.899,80.899) ; v1@125.75,117.65 C27.1@128.1,117.65 ; v1(128.8,61.5) C34.2@128.8,62.95 ; v1(129.1,101.5) C33.2@129.1,103.35 ; C28.1@131.6,78.45 134.05,78.45 v1(134.1,78.5) ; v1(136.7,54) 136.725,53.975 C39.1@138.096,53.975 C40.1@138.096,56.261 ; v1@138.7,42.8 139.487,43.587 U15.4@139.487,45.283 ; C55.2@140.589,39.972 142.878,39.972 C49.2@142.9,39.95 ; v1(143,38.3) 143,39.85 C49.2@142.9,39.95 ; C50.2@145.2,39.95 C49.2@142.9,39.95 ; C48.2@145.2,46.75 C47.2@149,46.75 149,47.6 149.5,48.1 149.8,48.1 150.4,48.7 150.4,49.476 150.624,49.7 v1(151.2,49.7)
  Top Layer w0.75: v1(32.385,75.565) U11.6@32.385,82.296 38.481,82.296 ; v1(38.481,81.001) 38.481,82.296 ; C35.1@47.752,80.518 C36.1@45.339,80.518 45.339,81.28 45.847,81.788 R23.1@45.847,82.851 44.37,82.851 43.815,82.296 U11.3@41.835,82.296 38.481,82.296 ; C35.1@47.799,80.471 C37.1@50.038,80.471 ; C37.1@50.038,80.518 C38.1@52.277,80.518 ; C43.1@52.324,100.156 v1(52.324,101.727)
  Top Layer w1: v1(32.233,50.167) U9.6@32.233,42.799 U9.3@41.683,42.799 43.688,42.799 44.577,41.91 ; U12.2@41.884,100.33 43.942,100.33 44.116,100.156 C42.1@45.339,100.156 C41.1@47.752,100.156 48.87,100.156 C44.1@50.038,100.156 C43.1@52.324,100.156 ; C10.1@45.466,41.91 C9.1@47.752,41.91 ; C10.1@45.974,42.418 R18.1@45.974,44.243 ; C12.1@50.038,39.163 C11.1@52.324,39.163 ; v1(125.7,117.7) v1@125.75,117.65
  Top Layer w1.016: v1(38.862,61.316) 38.886,61.292 U10.2@41.835,61.292 C22.1@45.337,61.292 ; C22.1@45.339,61.294 C21.1@47.752,61.294 ; 51.13,58.594 51.13,56.058 v1(51.156,56.032)
  other v1: 138.8,42.7 92,76.8
CONNECT_0: *1.31 *2.31 P10.33 pad.4 | length 79.1
  Top Layer w0.254: v1(146.177,79.756) 146.304,79.629 *1.31@146.304,77.342 ; v1(146.2,111.5) *2.31@146.2,117.855 ; P10.33@164.7,120.8 P10.33@164.7,120.44 165.017,120.44 166.675,122.098 170.078,122.098 172.11,120.066 pad.4@173.761,120.066
  Mid-Layer 1 w0.254: v1(146.177,79.756) v1@146.177,111.5 ; v1(146.2,111.5) 158.2,111.5 158.36,111.66 158.36,113.386 159.584,114.61 159.584,116.702 160.392,117.51 160.392,120.892 161.3,121.8 163.34,121.8 P10.33@164.7,120.44
CONNECT_1: *1.32 *2.32 P10.31 pad.6 | length 78.4
  Top Layer w0.254: *2.32@145,117.855 v1(145,110.4) v1(147.2,110.4) ; *1.32@145.034,77.342 v1(145.034,81.153) ; P10.31@164.7,118.2 P10.31@164.7,117.9 164.719,117.881 170.612,117.881 171.348,117.145 171.348,116.535 171.806,116.078 pad.6@173.812,116.078
  Mid-Layer 1 w0.254: v1(145.034,81.153) v1@145.034,110.4 ; v1(147.2,110.4) 158.7,110.4 158.868,110.568 158.868,113.176 160.092,114.4 160.092,116.492 160.9,117.3 160.9,118.6 161.4,119.1 163.5,119.1 P10.31@164.7,117.9
CONNECT_2: *1.33 *2.33 P10.29 pad.8 | length 78.9
  Top Layer w0.254: *1.33@143.764,77.342 v1(143.764,82.423) ; *2.33@143.8,117.855 v1(143.8,109.4) v1(148.3,109.4) ; P10.29@164.7,115.36 165.005,115.36 166.141,114.224 170.688,114.224 171.171,113.741 171.171,112.725 171.755,112.141 pad.8@173.787,112.141
  Mid-Layer 1 w0.254: v1(143.764,82.423) v1(143.8,109.4) ; v1(148.3,109.4) 159,109.4 159.376,109.776 159.376,112.902 160.6,114.126 160.6,116 161.2,116.6 163.46,116.6 P10.29@164.7,115.36
CONNECT_3: *1.34 *2.34 P10.27 pad.10 | length 79.9
  Top Layer w0.254: *1.34@142.494,77.342 v1(142.494,83.693) ; *2.34@142.494,117.855 142.5,117.849 v1(142.5,108.3) v1(147.2,108.3) ; P10.27@164.7,112.82 166.014,111.506 166.014,110.769 166.497,110.287 170.586,110.287 171.145,109.728 171.145,108.814 171.806,108.153 pad.10@173.812,108.153
  Mid-Layer 1 w0.254: v1(142.494,83.693) v1@142.494,108.3 ; v1(147.2,108.3) 159.5,108.3 159.884,108.684 159.884,111.318 160.9,112.334 160.9,113.5 161.5,114.1 163.5,114.1 P10.27@164.7,112.9
CONNECT_4: *1.35 *2.35 P10.25 pad.12 | length 80.9
  Top Layer w0.254: *1.35@141.224,77.342 v1(141.224,84.963) ; *2.35@141.224,117.855 141.2,117.831 v1(141.2,107.3) v1(148.3,107.3) ; P10.25@164.7,110.28 165.361,110.28 166.472,109.169 166.472,106.629 167.504,105.597 169.304,105.597 170.685,104.216 pad.12@173.787,104.216
  Mid-Layer 1 w0.254: v1(141.224,84.963) v1@141.224,107.3 ; v1(148.3,107.3) 160,107.3 160.392,107.692 160.392,108.518 160.9,109.026 160.9,110.9 161.5,111.5 163.48,111.5 P10.25@164.7,110.28
CONNECT_5: *1.36 *2.36 P10.23 pad.14 | length 81.8
  Top Layer w0.254: *1.36@139.954,77.342 v1(139.954,86.233) ; *2.36@140,117.855 v1(140,106.2) v1(147.2,106.2) ; P10.23@164.7,107.74 165.938,106.502 165.938,104.927 166.599,104.267 166.599,102.87 167.351,102.117 169.6,102.117 170.57,101.147 170.57,100.803 171.12,100.254 pad.14@173.812,100.254
  Mid-Layer 1 w0.254: v1(139.954,86.233) v1(140,106.2) ; v1(147.2,106.2) 160.3,106.2 160.9,106.8 160.9,108.3 161.5,108.9 163.54,108.9 P10.23@164.7,107.74
CONNECT_6: *1.37 *2.37 P10.21 pad.16 | length 82.4
  Top Layer w0.254: *1.37@138.684,77.342 v1(138.684,87.503) ; *2.37@138.684,117.855 138.7,117.839 v1(138.7,105.2) v1(148.3,105.2) ; P10.21@164.7,105.2 166.091,103.809 166.091,102.616 167.097,101.609 169.39,101.609 170.062,100.937 170.062,98.619 172.187,96.495 173.634,96.495 pad.16@173.838,96.291
  Mid-Layer 1 w0.254: v1(138.684,87.503) 138.7,87.519 v1(138.7,105.2) ; v1(148.3,105.2) 160.4,105.2 161.6,106.4 163.5,106.4 P10.21@164.7,105.2
CONNECT_7: *1.38 *2.38 P10.19 pad.18 | length 85.9
  Top Layer w0.254: *1.38@137.414,77.342 v1(137.414,88.773) ; *2.38@137.414,117.855 137.4,117.841 v1(137.4,104.3) 138.1,104.3 138.4,104 v1(147.2,104) ; P10.19@164.7,102.66 165.158,102.66 166.014,101.803 166.014,100.617 166.421,100.21 166.421,99.111 166.878,98.654 169.266,98.654 169.494,98.425 169.527,98.425 170.713,97.238 170.713,92.583 170.967,92.329 pad.18@173.838,92.329
  Mid-Layer 1 w0.254: v1(137.4,104.3) 137.4,88.787 v1(137.414,88.773) ; v1(147.2,104) 163.5,104 P10.19@164.7,102.8
CONNECT_8: *1.14 *2.14 P10.17 pad.20 | length 88.9
  Top Layer w0.254: *1.14@145.034,61.342 145.034,69.088 145.669,69.723 v1(145.669,70.231) ; *2.14@145.034,101.855 145.034,91.566 v1(147.1,89.5) 158.576,89.5 159.176,90.1 159.176,92.076 160.8,93.7 160.8,95.279 161.97,96.449 162.628,96.449 163.291,97.112 163.291,98.711 P10.17@164.62,100.04 ; P10.17@164.62,100.12 P10.17@164.7,100.12 165.386,100.12 165.913,99.593 165.913,98.45 166.446,97.917 169.316,97.917 170.205,97.028 170.205,91.999 pad.20@173.838,88.367
  Mid-Layer 1 w0.254: v1(145.669,70.231) 146.558,70.231 150.487,74.16 150.487,87.384 148.371,89.5 v1(147.1,89.5)
CONNECT_9: *1.13 *2.13 P10.15 pad.22 | length 90.2
  Top Layer w0.254: *1.13@143.764,61.342 143.891,61.469 v1(143.891,70.358) ; *2.13@143.764,101.855 143.764,91.436 v1@147.05,88.15 ; v1(147.1,88.2) 159.284,88.2 159.684,88.6 159.684,91.623 161.97,93.909 162.628,93.909 163.569,94.85 163.569,96.569 164.58,97.58 166.847,95.313 166.847,90.541 167.132,90.256 169.515,90.256 170.647,89.124 170.647,84.877 171.12,84.404 pad.22@173.787,84.404
  Mid-Layer 1 w0.254: v1(143.891,70.358) 144.018,70.485 144.653,70.485 149.979,75.811 149.979,85.321 v1(147.1,88.2)
CONNECT_10: *1.12 *2.12 P10.13 pad.24 | length 90.5
  Top Layer w0.254: *1.12@142.494,61.342 v1(142.494,70.739) ; 142.494,91.5 *2.12@142.494,101.855 ; 142.5,91.5 v1(147.1,86.9) ; v1@147.1,86.6 v1(147.1,86.9) ; P10.13@164.7,94.7 163.291,93.291 163.291,92.032 162.628,91.369 161.369,91.369 160.192,90.192 160.192,87.292 159.8,86.9 v1(147.1,86.9) ; P10.13@164.7,95.04 166.339,93.401 166.339,90.068 166.66,89.748 169.304,89.748 170.139,88.913 170.139,84.115 pad.24@173.838,80.416
  Mid-Layer 1 w0.254: v1(142.494,70.739) 143.026,70.739 143.526,71.239 143.883,71.239 149.471,76.827 149.471,84.474 147.465,86.481 147.219,86.481 147.1,86.6 v1(147.1,86.9)
CONNECT_11: *1.11 *2.11 P10.11 pad.26 | length 90.1
  Top Layer w0.254: *1.11@141.224,61.342 141.224,71.12 v1(142.875,72.771) ; *2.11@141.224,101.855 141.224,91.476 v1(147.1,85.6) 160.3,85.6 160.7,86 160.7,88.2 161.329,88.829 162.628,88.829 163.291,89.492 163.291,90.791 164.7,92.2 P10.11@164.7,92.222 ; P10.11@164.7,92.5 P10.11@164.7,92.222 ; pad.26@173.812,76.479 173.812,77.397 167.377,83.832 167.377,87.769 165.831,89.315 165.831,91.091 P10.11@164.7,92.222
  Mid-Layer 1 w0.254: v1(142.875,72.771) 143.891,72.771 148.963,77.843 148.963,84.209 147.672,85.5 147.1,85.5 v1(147.1,85.6)
CONNECT_12: *1.10 *2.10 P10.9 pad.28 | length 91.4
  Top Layer w0.254: *1.10@139.954,61.342 v1(139.954,72.009) ; *2.10@139.954,101.855 139.954,91.313 v1@147.042,84.225 ; v1(147.083,84.267) 160.396,84.267 161.029,84.9 161.029,85.348 161.881,86.2 162.6,86.2 163.569,87.169 163.569,88.551 164.7,89.682 P10.9@164.7,89.96 164.7,89.427 166.853,87.274 166.853,80.292 169.284,77.86 169.33,77.86 170.139,77.051 170.139,76.191 pad.28@173.812,72.517
  Mid-Layer 1 w0.254: v1(139.954,72.009) 140.97,72.009 141.994,73.033 141.994,73.136 142.51,73.652 143.24,73.652 143.286,73.606 143.583,73.606 148.455,78.478 148.455,82.89 147.2,84.146 147.2,84.3 147.167,84.267 v1(147.083,84.267)
CONNECT_13: *1.9 *2.9 P10.7 pad.30 | length 93.6
  Top Layer w0.254: v1(138.557,72.898) 138.557,61.469 *1.9@138.684,61.342 ; *2.9@138.684,101.855 138.684,91.421 146.719,83.386 146.738,83.386 147.1,83.024 v1(147.1,83) 160.1,83 160.9,83.8 160.951,83.749 162.628,83.749 163.291,84.412 163.291,85.091 164.7,86.5 P10.7@164.7,87.42 166.339,85.781 166.339,81.661 166.319,81.641 166.319,80.938 166.339,80.918 166.339,78.682 166.319,78.662 166.319,76.965 170.164,73.12 170.164,72.228 pad.30@173.838,68.555
  Mid-Layer 1 w0.254: v1(138.557,72.898) 141.038,72.898 142.3,74.16 143.121,74.16 147.947,78.986 147.947,82.05 v1@147.1,82.897 ; v1@147.1,82.897 v1(147.1,83) v1@147.1,82.897 ; v1@147.1,82.897 147.1,82.815 v1@147.1,82.897
CONNECT_14: *1.8 *2.8 P10.5 pad.32 | length 95.1
  Top Layer w0.254: *1.8@137.414,61.342 137.414,62.611 137.668,62.865 v1(137.668,74.041) ; *2.8@137.414,101.855 137.414,91.313 v1(147.066,81.661) 161.24,81.661 161.692,81.209 162.809,81.209 163.52,81.92 163.52,83.12 164.7,84.3 164.7,84.602 165.831,83.471 165.831,81.872 165.811,81.852 165.811,80.728 165.831,80.708 165.831,78.892 165.811,78.872 165.811,73.51 170.088,69.234 170.088,68.317 pad.32@173.812,64.592
  Mid-Layer 1 w0.254: v1(137.668,74.041) 141.462,74.041 142.089,74.668 142.867,74.668 147.066,78.867 v1(147.066,81.661)
CONNECT_15: *1.7 *2.7 P10.3 pad.34 | length 106.8
  Top Layer w0.254: *1.7@136.144,61.342 136.144,69.342 v1(136.652,69.85) ; v1(136.144,99.695) 136.144,100.457 *2.7@136.144,101.855 ; P10.3@164.7,82.34 164.7,82.062 163.569,80.931 163.569,67.777 168.135,63.211 169.351,63.211 171.933,60.63 pad.34@173.787,60.63
  Mid-Layer 1 w0.254: v1(136.144,99.695) 136.533,99.306 136.533,69.969 v1(136.652,69.85) 142.137,69.85 142.637,69.35 146.395,69.35 150.995,73.95 150.995,80.795 151.3,81.1 163.5,81.1 P10.3@164.7,82.3
DIO0: *2.15 Pwest1.1 | length 173.6
  Top Layer w0.254: Pwest1.1@75.253,31.103 75.253,18.647 76.04,17.86 150.36,17.86 v1(150.4,17.9) ; *2.15@146.304,101.855 146.304,99.496 v1(147.1,98.7)
  Mid-Layer 2 w0.254: v1(147.1,98.7) 147.1,90.746 147.981,89.864 147.981,65.619 149.811,63.789 149.811,48.565 150.4,47.976 v1(150.4,17.9)
DIO1: *2.16 Pwest1.3 | length 171.3
  Top Layer w0.254: Pwest1.3@77.793,31.103 77.793,19.107 78.532,18.368 149.622,18.368 150.035,18.781 150.765,18.781 150.846,18.7 v1(151.5,18.7) ; v1(147.5,100) *2.16@147.5,101.781
  Mid-Layer 2 w0.254: v1(147.5,100) 147.5,99.8 147.981,99.319 147.981,98.335 147.608,97.962 147.608,91.1 148.489,90.219 148.489,65.829 150.319,63.999 150.319,48.775 151.5,47.594 v1(151.5,18.7)
DIO2: *2.17 Pwest1.5 | length 168.3
  Top Layer w0.254: Pwest1.5@80.333,31.103 80.333,19.467 80.924,18.876 149.412,18.876 150.117,19.581 152.381,19.581 v1@152.4,19.6 ; *2.17@148.844,101.855 148.8,101.811 148.8,100.2 148.997,100.003 v1(148.997,98.797)
  Mid-Layer 2 w0.254: v1(148.997,98.797) 148.997,66.04 150.827,64.21 150.827,51.2 151.446,50.581 151.565,50.581 152.081,50.065 152.081,48.349 152.3,48.13 152.3,19.5 v1(152.4,19.6)
DIO3: *2.18 Pwest1.7 | length 168.4
  Top Layer w0.254: Pwest1.7@82.873,31.103 82.873,19.951 83.44,19.384 149.201,19.384 150.298,20.481 153.381,20.481 v1(153.4,20.5) ; *2.18@150.494,103.505 150.494,102.006 v1(150.5,102)
  Mid-Layer 2 w0.254: v1(150.5,102) 149.878,101.378 149.878,98.432 149.505,98.059 149.505,66.25 151.335,64.42 151.335,51.565 153.378,49.522 153.4,49.522 153.916,49.006 153.916,48.276 153.2,47.56 153.2,20.3 v1(153.4,20.5)
DIO4: *2.19 Pwest1.9 | length 170.8
  Top Layer w0.254: Pwest1.9@85.413,31.103 85.432,31.084 85.432,20.6 86.14,19.892 148.86,19.892 150.468,21.5 154,21.5 v1(154.1,21.6) ; *2.19@150.494,104.775 152.075,104.775 152.075,104.725 152.2,104.6 152.2,102 v1(152.1,102)
  Mid-Layer 2 w0.254: v1(152.1,102) 150.386,100.286 150.386,97.849 150.013,97.476 150.013,66.461 153.154,63.32 153.154,58.769 152.281,57.896 152.281,51.53 156.583,47.228 156.583,45.983 155.1,44.5 154.6,44.5 154,43.9 154,21.7 v1(154.1,21.6)
DIO5: *2.20 Pwest1.11 | length 168.8
  Top Layer w0.254: Pwest1.11@87.953,31.103 87.953,20.4 148.65,20.4 150.731,22.481 154.881,22.481 v1(155,22.6) ; *2.20@150.494,106.045 151.854,106.045 152.981,104.918 152.981,101.635 152.465,101.119 152.419,101.119 152.1,100.8 v1(152.1,100.6)
  Mid-Layer 2 w0.254: v1(152.1,100.6) 151.7,100.6 150.894,99.794 150.894,97.638 150.521,97.265 150.521,66.671 154.043,63.149 154.043,50.486 157.091,47.438 157.091,45.773 155,43.681 v1(155,22.6)
DIO6: *2.21 Pwest1.13 | length 166.8
  Top Layer w0.254: Pwest1.13@90.493,31.103 90.493,21.607 91.1,21 148.531,21 151.012,23.481 155.956,23.481 v1(156.018,23.418) ; *2.21@150.494,107.315 151.815,107.315 153.5,105.63 153.5,100.5 152.2,99.2 v1(152.1,99.3)
  Mid-Layer 2 w0.254: v1(152.1,99.3) 152.1,99.098 151.402,98.4 151.402,97.428 151.029,97.055 151.029,66.882 154.551,63.36 154.551,50.697 157.599,47.649 157.599,45.562 156.018,43.982 v1(156.018,23.418)
DIO7: *2.22 Pwest1.15 | length 165.5
  Top Layer w0.254: Pwest1.15@93.033,31.103 93.033,22.267 93.792,21.508 148.321,21.508 151.112,24.299 156.888,24.299 v1(156.899,24.311) ; *2.22@150.494,108.585 151.515,108.585 154.008,106.092 154.008,99.962 152.3,98.254 v1(152.3,97.9)
  Mid-Layer 2 w0.254: v1(152.3,97.9) 152.2,97.9 151.91,97.61 151.91,97.217 151.537,96.844 151.537,69.8 152.003,69.334 153.146,69.334 155.059,67.421 155.059,50.907 158.107,47.859 158.107,45.352 156.889,44.133 156.889,24.3 v1(156.899,24.311)
DIO8: *2.23 Pwest1.17 | length 164.4
  Top Layer w0.254: Pwest1.17@95.573,31.103 95.573,22.673 96.23,22.016 148.11,22.016 151.286,25.192 158.092,25.192 158.084,25.2 v1(157.9,25.2) ; *2.23@150.494,109.855 151.645,109.855 154.516,106.984 154.516,98.87 152.5,96.854 v1(152.5,96.3)
  Mid-Layer 2 w0.254: v1(152.5,96.3) 152.3,96.3 152.045,96.045 152.045,70.2 152.403,69.842 153.356,69.842 155.567,67.631 155.567,51.2 158.615,48.152 158.615,45.141 157.9,44.426 v1(157.9,25.2)
DIO9: *2.24 Pwest1.19 | length 163.1
  Top Layer w0.254: Pwest1.19@98.113,31.103 98.113,23.213 98.802,22.524 147.9,22.524 151.457,26.081 158.881,26.081 v1(158.862,26.1) ; *2.24@150.494,111.125 151.575,111.125 155.024,107.676 155.024,97.578 152.9,95.454 152.9,95.072 v1(152.926,95.046)
  Mid-Layer 2 w0.254: v1(152.926,95.046) 152.919,95.053 152.553,95.053 152.553,70.5 152.703,70.35 153.567,70.35 156.075,67.842 156.075,52.3 156.44,51.935 157.337,51.935 159.123,50.149 159.123,44.931 158.862,44.67 v1(158.862,26.1)
DIO10: *2.25 Pwest1.21 | length 161.3
  Top Layer w0.254: Pwest1.21@100.653,31.103 100.653,23.679 101.3,23.032 147.689,23.032 151.638,26.981 159.781,26.981 v1(159.8,27) ; *2.25@150.494,112.395 151.705,112.395 155.532,108.568 155.532,96.406 153.4,94.274 153.4,93.8 v1(153.5,93.7)
  Mid-Layer 2 w0.254: v1(153.5,93.7) 153.3,93.7 153.061,93.461 153.061,71.574 156.583,68.052 156.583,56.5 158.1,54.983 159.115,54.983 159.631,54.467 159.631,27.169 v1(159.8,27)
DIO11: *2.26 Pwest1.23 | length 160
  Top Layer w0.254: Pwest1.23@103.193,31.103 103.193,24.107 103.76,23.54 147.479,23.54 151.82,27.881 160.581,27.881 v1@160.7,28 ; *2.26@150.494,113.665 151.835,113.665 156.04,109.46 156.04,94.994 153.9,92.854 153.9,92.2 v1(154,92.1)
  Mid-Layer 2 w0.254: v1(154,92.1) 153.6,91.7 153.6,71.869 157.091,68.378 157.091,58.5 158.322,57.269 159.369,57.269 160.7,55.938 v1(160.7,28)
DIO12: *2.27 Pwest1.25 | length 159
  Top Layer w0.254: Pwest1.25@105.733,31.103 105.733,24.567 106.252,24.048 147.269,24.048 152.121,28.9 v1(161.7,28.9) ; *2.27@150.494,114.935 152.165,114.935 156.548,110.552 156.548,93.402 154.5,91.354 v1(154.5,90.7)
  Mid-Layer 2 w0.254: v1(154.5,90.7) 154.4,90.7 154.108,90.408 154.108,72.079 157.599,68.588 157.599,58.9 158.722,57.777 159.579,57.777 161.7,55.656 v1(161.7,28.9)
DIO13: *2.28 Pwest1.27 | length 157.1
  Top Layer w0.254: Pwest1.27@108.273,31.103 108.3,31.076 108.3,25.3 109.044,24.556 147.058,24.556 152.302,29.8 v1(162.9,29.8) ; *2.28@150.494,116.205 151.108,115.591 152.227,115.591 157.056,110.762 157.056,91.936 155.8,90.68 v1(155.8,90.6)
  Mid-Layer 2 w0.254: v1(155.8,90.6) 155.8,89.784 154.616,88.6 154.616,72.29 158.107,68.799 158.107,59.968 162.9,55.175 v1(162.9,29.8)
DIO14: *2.29 Pwest1.29 | length 157.6
  Top Layer w0.254: Pwest1.29@110.813,31.103 110.813,25.787 111.536,25.064 146.848,25.064 152.484,30.7 v1(163.9,30.7) ; *2.29@148.844,117.855 150.345,117.855 151.339,116.861 151.676,116.861 157.564,110.973 157.564,91.725 157.2,91.361 157.2,90.6 v1(157.1,90.6)
  Mid-Layer 2 w0.254: v1(157.1,90.6) 157,90.6 156.681,90.281 156.681,89.947 155.124,88.39 155.124,72.5 158.615,69.009 158.615,60.2 163.9,54.915 v1(163.9,30.7)
DIO15: *2.30 Pwest1.31 | length 159.6
  Top Layer w0.254: Pwest1.31@113.353,31.103 113.4,31.056 113.4,26.2 114.028,25.572 146.637,25.572 152.646,31.581 164.581,31.581 v1(164.8,31.8) ; *2.30@147.574,117.855 147.574,119.326 148.048,119.8 148.612,119.236 150.019,119.236 158.072,111.183 158.072,91.128 158.213,91.128 v1(158.279,91.194)
  Mid-Layer 2 w0.254: v1(158.279,91.194) 157.981,90.896 157.981,90.235 157.465,89.719 157.172,89.719 155.632,88.179 155.632,72.711 159.123,69.22 159.123,60.41 164.7,54.833 164.7,31.9 v1(164.8,31.8)